# Altium PCB PCB.PcbDoc
Units mm, origin at the board's own origin, x right, y up, seen from the top; angles counter-clockwise.
Board outline 74.5 x 80 mm, 2 copper layers (Top Layer, Bottom Layer), stack 1.571 mm thick; 31 components, 20 nets, 104 pads, 39 vias.
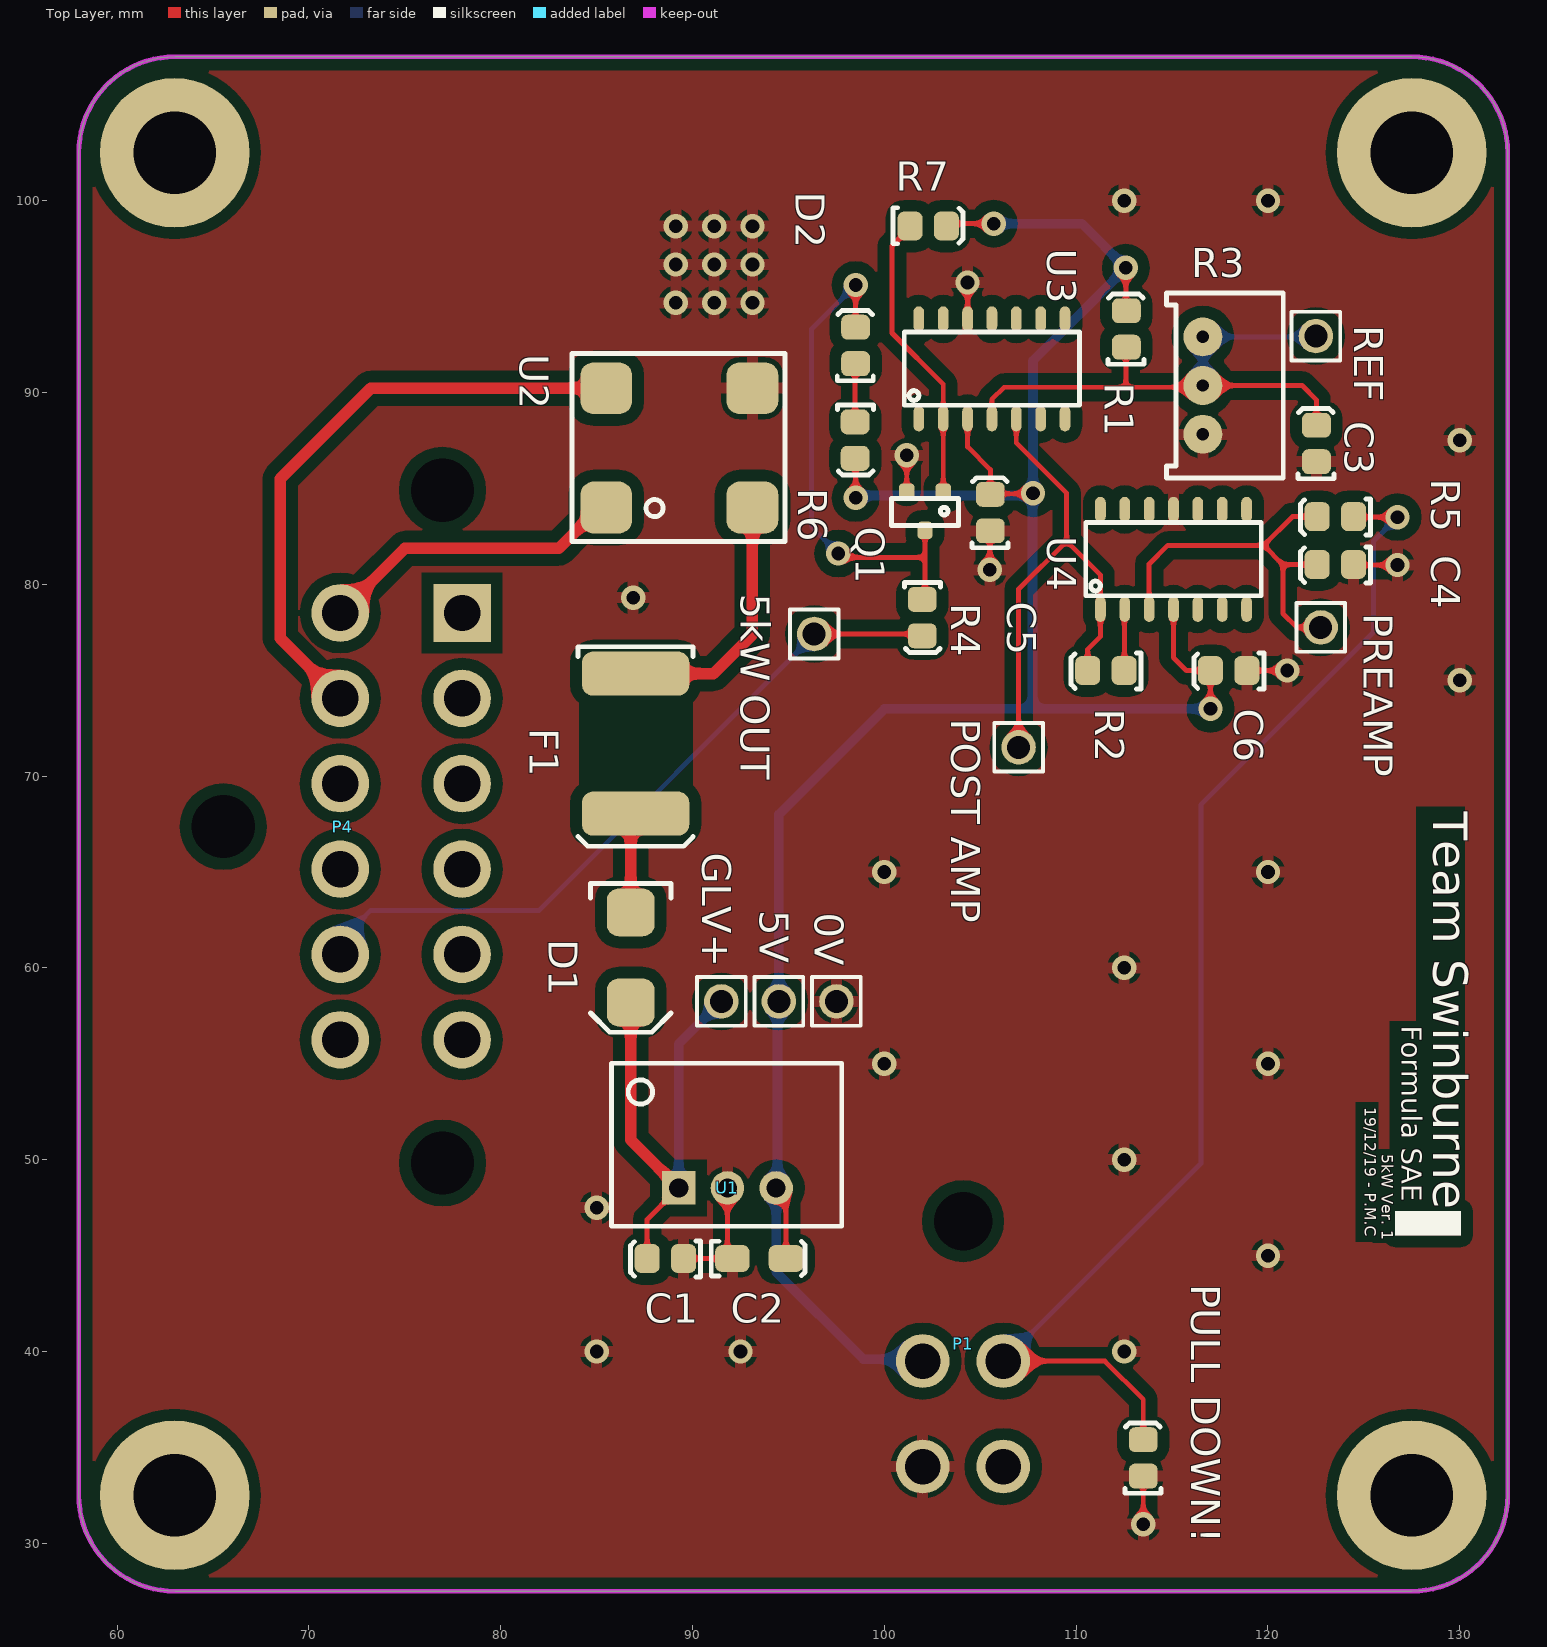
[diagram p0: Top Layer view]
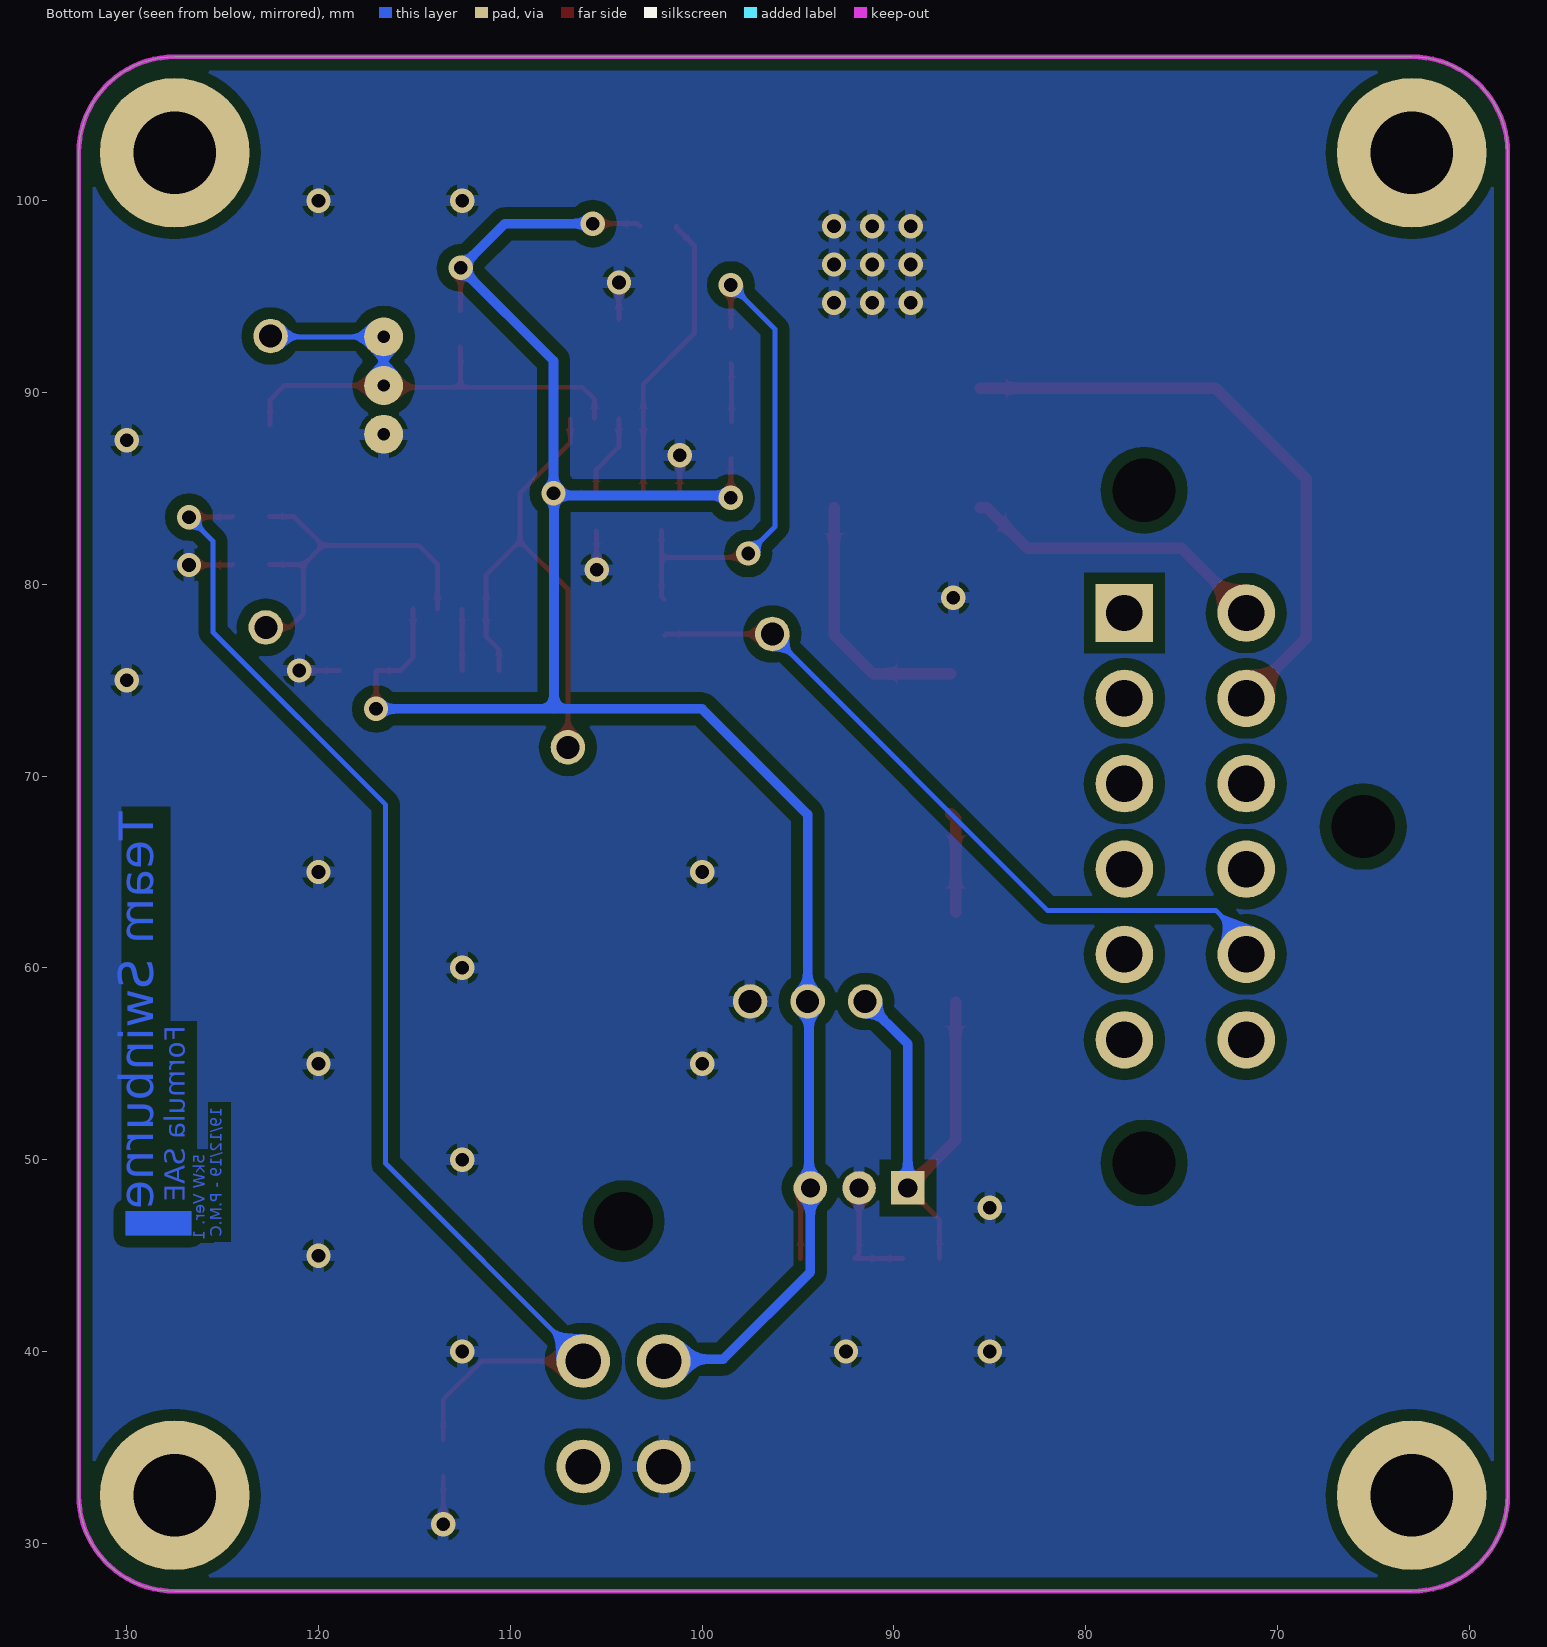
[diagram p1: Bottom Layer view, seen from below]
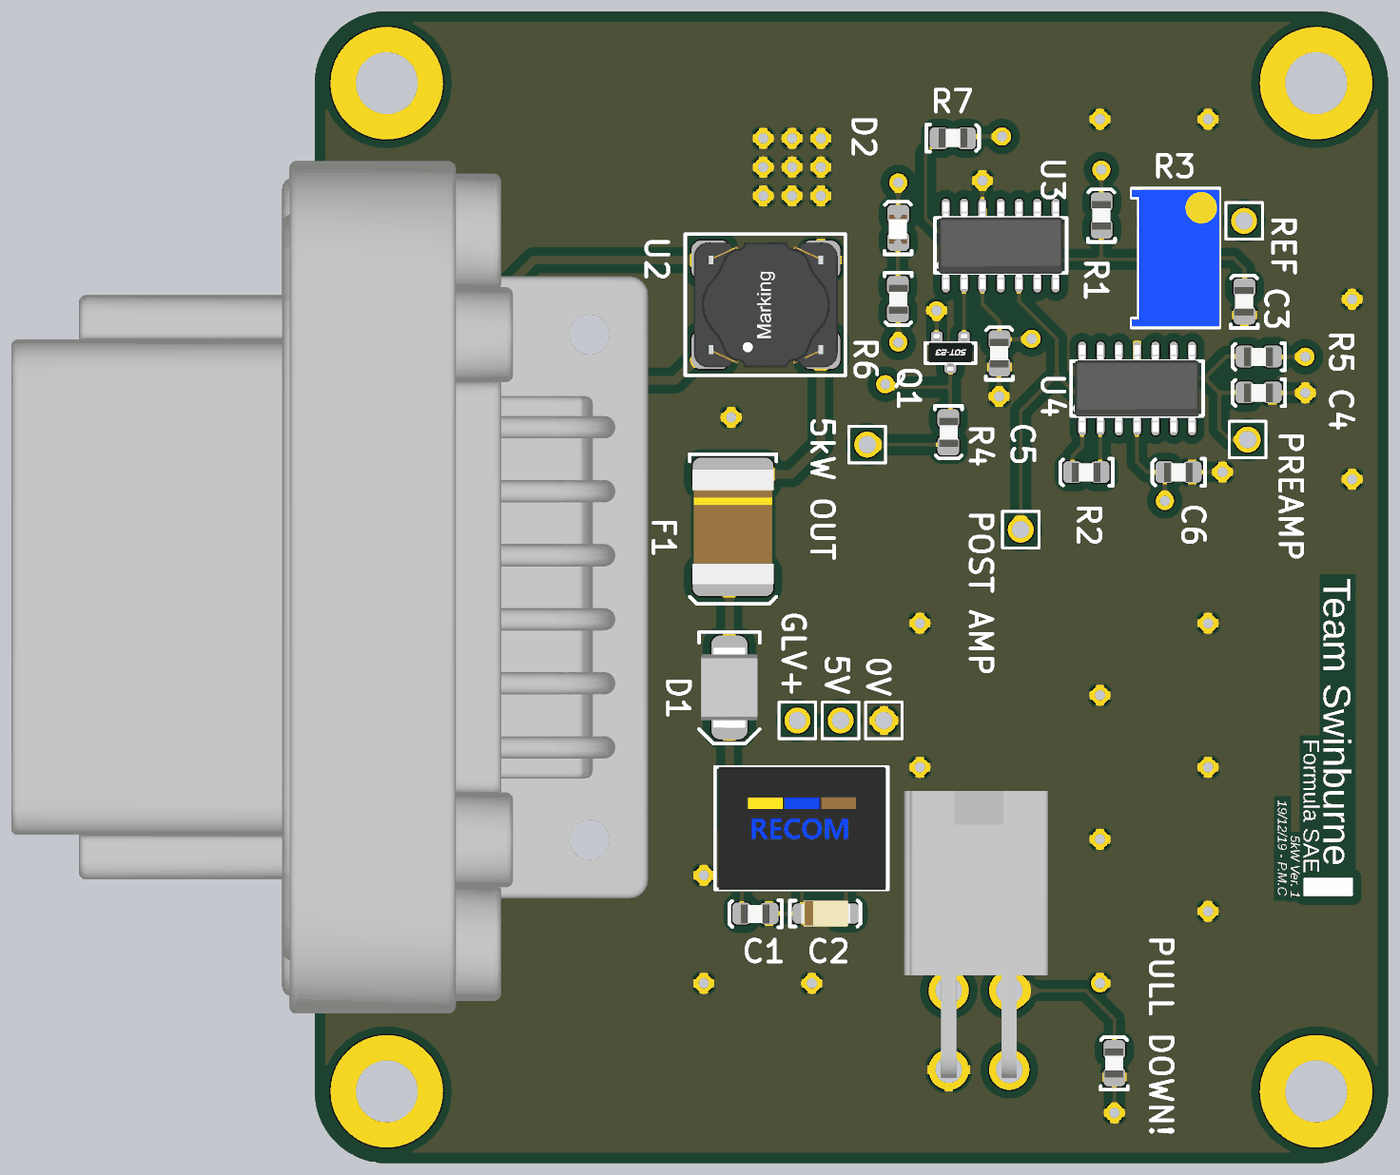
[diagram p2: 3D render of the assembled board from above, using the file's embedded part models]

## Layer stack, top to bottom
Top Solder: solder mask 0.0102, Solder Resist, Dk 3.5
Top Layer: signal copper 0.0356
Dielectric 1: dielectric 1.5, FR-4, Dk 4.8
Bottom Layer: signal copper 0.0356
Bottom Solder: solder mask 0.0102, Solder Resist, Dk 3.5

## Board outline
58,32.5 ccw(c63,32.5) 63,27.5 127.5,27.5 ccw(c127.5,32.5) 132.5,32.5 132.5,102.5 ccw(c127.5,102.5) 127.5,107.5 63,107.5 ccw(c63,102.5) 58,102.5

## Design rules (kind name [scope] priority, off if disabled: settings)
Clearance [All] p1: gap=0.254 ignorepadtopadclearanceinfootprint=FALSE except(0: Arc-Hole Track-Hole SMDPad-Hole THPad-Hole Via-Hole Fill-Hole Poly-Hole Region-Hole Text-Hole; 0.6: Arc-Poly Track-Poly SMDPad-Poly THPad-Poly Via-Poly Fill-Poly Poly-Poly)
Height [All] p1: minheight=0 maxheight=100 prefheight=12.7
PlaneConnect [All] p1: planeconnectstyle=Relief reliefexpansion=0.508 reliefentries=4 reliefconductorwidth=0.6 reliefairgap=0.254
PolygonConnect [All] p1: connectstyle=Relief reliefconductorwidth=0.6 reliefentries=4 polygonreliefangle="90 Angle" airgapwidth=0.254
RoutingVias [All] p1: holewidth=0.711 width=1.27 viastyle="Through Hole" minholewidth=0.711 minwidth=1.27 maxholewidth=0.711 maxwidth=1.27
SolderMaskExpansion [All] p1: expansion=0.102
Width [All] p1: maxlimit=2 minlimit=0.254 preferedwidth=0.254 minimp=50.000000 maximp=50.000000 favimp=50.000000
28 further rules are at their usual default settings.

## Components (designator, comment, footprint, x,y, rotation, side; value= is the part's Value field where it differs from the comment)
0V "0mm" "TH Test Point" 97.5,58.25 r0 top
"5kW OUT" "0mm" "TH Test Point" 96.344,77.406 r90 top
5V "0mm" "TH Test Point" 94.5,58.25 r270 top
C1 "10uF" 0805 88.57,44.819 r180 top
C2 "22uF" 1206 94.672,44.845 r0 top
C3 "100nF" 0805 122.499,87.352 r90 top
C4 "100nF" 0805 123.5,81 r180 top
C5 "100nF" 0805 105.5,83.75 r90 top
C6 "100nF" 0805 117.938,75.474 r180 top
D1 "SD560BTR" "SMB Diode" 86.778,62.645 r270 top
D2 "Blue" "0805 LED" 98.474,92.462 r90 top
F1 "0ZCF0200AF2C" 2920 87.032,75.34 r270 top
GLV+ "0mm" "TH Test Point" 91.5,58.25 r270 top
P1 "26013115" 26013115 106.2,34 r180 top
P4 "DT13-12P" DT13-12P 71.632,78.5 r270 top
"POST AMP" "0mm" "TH Test Point" 107,71.5 r270 top
PREAMP "0mm" "TH Test Point" 122.75,77.75 r0 top
"PULL DOWN!" "30k" 0805 113.474,34.462 r90 top (schematic designator R8)
Q1 "2N7002K" "ON SOT-23 MOSFET" 102.118,83.812 r180 top
R1 "10k" 0805 112.593,93.321 r90 top
R2 "1k" 0805 111.538,75.474 r180 top
R3 "10K (Var)" "B 3296" 117.165,90.273 r270 top
R4 "100R" 0805 102,78.25 r270 top
R5 "1k" 0805 123.5,83.5 r180 top
R6 "1.5k" 0805 98.5,87.5 r270 top
R7 "3k" 0805 102.3,98.7 r0 top
REF "0mm" "TH Test Point" 122.499,92.94 r0 top
U1 "R-78C5.0-1.0" "RECOM 3-SIP" 89.278,48.528 r0 top
U2 "744272121" "Wurth 4-PC Pad" 93.12,90.22 r180 top
U3 "LMV339IDR" "TI 14-SOIC" 120.848,86.029 r0 top
U4 "LM324D" "TI 14-SOIC" 130.314,76.1 r0 top

## Footprints (in the part's own frame and the unit in brackets; to place one, negate y for a bottom-side part, rotate by r counter-clockwise, add the part's x,y. Pads: shape width x height; smd on the part's side, far side on the other; paste and mask are expansions set on the pad)
0805 [mm]
  rrect50% 1.3x1.5 smd: 1(-0.962,-0.026) 2(0.938,-0.026)
  silkscreen extent -1.85,-0.95 1.8,0.93, body extent -1,-0.65 1,0.66, height 0.73
"0805 LED" [mm]
  rrect50% 1.3x1.5 smd: A(-0.962,-0.026) K(0.938,-0.026)
  silkscreen extent -1.85,-0.95 1.8,0.93, body extent -1.1,-0.62 0.9,0.62, height 1
1206 [mm]
  rrect50% 1.8x1.4 smd: 1(-2.6,0) 2(0.2,0)
  silkscreen extent -3.7,-0.9 1.2,0.9, body extent -2.9,-0.9 0.5,0.9, height 1.85
2920 [mm]
  rrect50% 2.3x5.6 smd: 1(0,0) 2(7.3,0)
  silkscreen extent -1.4,-3 9,3, body extent -0.34,-2.81 7.64,2.81, height 1.14
26013115 [mm]
  round 2.8 hole 1.85: 1(4.2,-5.5) 2(0,-5.5) 3(4.2,0) 4(0,0)
  round 1.524 hole 3.05: ""(2.1,-12.8)
  body extent -2.7,-19.37 7.3,0.57, height 11.4
"B 3296" [mil]
  round 80 hole 25.2: 1(-103.39,-22) 2(-3.39,-22) 3(96.61,-22)
  silkscreen extent -193,-97 187,143, body extent -191,-97 184,143, height 455
DT13-12P [mm]
  round 3 hole 3.3 unplated: 0(-6.405,5.33) 0(11.135,-6.1) 0(28.675,5.33)
  rect 3x3 hole 1.9: 1(0,6.35)
  round 3 hole 1.9: 2(4.45,6.35) 3(8.9,6.35) 4(13.35,6.35) 5(17.8,6.35) 6(22.25,6.35) 7(22.25,0) 8(17.8,0) 9(13.35,0) 10(8.9,0) 11(4.45,0) 12(0,0)
  body extent -18.6,-34.7 40.6,9.5, height 37.63
"ON SOT-23 MOSFET" [mm] "NUP2105L"
  rrect50% 0.8x0.9 smd: D(0,1) G(-0.95,-1) S(0.95,-1)
  silkscreen extent -1.75,-0.65 1.75,0.75, body extent -1.5,-1.27 1.5,1.28, height 1
"RECOM 3-SIP" [mm] "12 to 42 Vdc In, 9 Vdc Out"
  rect 1.75x1.75 hole 1: 1(0,0)
  round 1.75 hole 1: 2(2.54,0) 3(5.08,0)
  silkscreen extent -3.5,-2 8.5,6.5, body extent -3.26,-2.02 8.34,6.48, height 11.41
"SMB Diode" [mm]
  rrect50% 2.5x2.5 smd: A(-0.25,0) K(4.45,0)
  silkscreen extent -1.75,-2.1 6,2.1, body extent -0.69,-1.97 4.9,1.97, height 2.5
"TH Test Point" [mm]
  round 1.8 hole 1.2: 1(0,0)
  silkscreen extent -1.27,-1.27 1.27,1.27
"TI 14-SOIC" [mil]
  oval 22x52 smd: 1(-750,102.36) 2(-700,102.36) 3(-650,102.36) 4(-600,102.36) 5(-550,102.36) 6(-500,102.36) 7(-450,102.36) 8(-450,307.09) 9(-500,307.09) 10(-550,307.09) 11(-600,307.09) 12(-650,307.09) 13(-700,307.09) 14(-750,307.09)
  silkscreen extent -780,130 -420,280, body extent -770,86 -430,323, height 69
"Wurth 4-PC Pad" [mm]
  rrect50% 2.7x2.7 smd: 1(7.62,6.22) 2(0,6.22) 3(0,0) 4(7.62,0)
  silkscreen extent -1.7,-1.8 9.4,8, body extent -1.19,-1.24 8.81,7.46, height 6.2

## Part data
0V "5kW OUT" 5V GLV+ "POST AMP" PREAMP REF: library part "TH Test Point", Angle=0, Contact=NA, Flange=No, Part Number="TH Test Point", Pitch=0mm, Positions=1, Row Spacing=0mm
C1: library part GRM21BR6YA106KE43L, Digikey Part Number=490-10514-6-ND, Manufacturer=muRata, Rated Voltage=50V, Tolerance=10%, Material=X5R, Part Number=GRM21BR6YA106KE43L
C2: library part CC1206MKX5R7BB226, Digikey Part Number=311-1997-2-ND, Manufacturer=YAGEO, Rated Voltage=16V, Tolerance=20%, Material=Ceramic, Part Number=CC1206MKX5R7BB226
C3 C4 C5 C6: library part GCM21BR71E104KA37L, Manufacturer=muRata, Rated Voltage=25V, Tolerance=10%, Material=X7R, Part Number=GCM21BR71E104KA37L
D1: "1.2V_F 600V 5A SMB", Digikey Part Number=1655-1530-2-ND, Manufacturer="SMC Diode Solutions", Digikey Link=https://www.digikey.com/product-detail/en/smc-diode-solutions/SD560BTR/1655-1530-2-ND/6022620, Part Number=SD560BTR
D2: library part SML-MN2BCTT86C, "LED BLUE CLEAR 2012 SMD", Digikey Part Number=846-1207-1-ND, Manufacturer="ROHM Semiconductor", Colour=Blue, Digikey Link=https://www.digikey.com/product-detail/en/rohm-semiconductor/SMLMN2BCTT86C/846-1207-1-ND/6057239, Part Number=SML-MN2BCTT86C
F1: "SMD 24V 2A Fuse", Digikey Part Number=507-1749-2-ND, Manufacturer="Bel Fuse Inc", Digikey Link=https://www.digikey.com/product-detail/en/bel-fuse-inc/0ZCF0200AF2C/507-1749-2-ND/4156090, Part Number=0ZCF0200AF2C
P1: Digikey Part Number=WM13112-ND, Angle=90, Contact=Brass, Digikey Link=https://www.digikey.com/products/en?keywords=26013115, Flange=No, Part Number=26013115, Pitch=4.20mm, Positions=4, Row Spacing=4.2mm
P4: library part DT13-12P[[/\]]DT13-12P, Digikey Part Number=1734-1451-ND, Angle=90, Contact=Nickel, Digikey Link=https://www.digikey.com.au/product-detail/en/te-connectivity-deutsch-connectors/DT13-12PA/1734-1451-ND/7220123, Flange=Yes, Part Number=DT13-12P, Pitch=4.44mm, Positions=12, Row Spacing=6.35mm
"PULL DOWN!": library part RC0805FR0730KL, Manufacturer=YAGEO, Rated Voltage=0.125W, Tolerance=0.01, Material=FR-07, Part Number=RC0805FR0730KL
Q1: "60V 380mA, NFET MOSTFET (Small Signal)", Digikey Part Number=2N7002KCT-ND, Manufacturer="ON Semiconductor", Digikey Link=https://www.digikey.com/product-detail/en/on-semiconductor/2N7002K/2N7002KCT-ND/2060375, LatestRevisionDate=29-May-2009, LatestRevisionNote="IPC-7351 Footprint Added.", PackageDescription="4-Pin SOT-343 Package 1.3 mm Pitch, 2.1 mm Lead Span", PackageReference=SOT-343, PackageVersion=Sep-2000, Part Number=2N7002K, Published=24-Mar-1999, Publisher="Altium Limited", Qty=30
R1: library part RC0805FR0710KL, Manufacturer=YAGEO, Rated Voltage=0.125W, Tolerance=0.01, Material=FR-07, Part Number=RC0805FR0710KL
R2 R5: library part RC0805FR071KL, Manufacturer=YAGEO, Rated Voltage=0.125W, Tolerance=0.01, Material=FR-07, Part Number=RC0805FR071KL
R3: library part 3296W-1-103LF, Digikey Part Number=3296W-103LF-ND, Manufacturer="Bournes Inc", Rated Voltage=0.5W, Tolerance=0.1, Part Number=3296W-1-103LF
R4: library part RC0805FR07100RL, Manufacturer=YAGEO, Rated Voltage=0.125W, Tolerance=0.01, Material=FR-07, Part Number=RC0805FR07100RL
R6: library part RC0805FR071K5L, Manufacturer=YAGEO, Rated Voltage=0.125W, Tolerance=0.01, Material=FR-07, Part Number=RC0805FR071K5L
R7: library part RC0805FR073KL, Manufacturer=YAGEO, Rated Voltage=0.125W, Tolerance=0.01, Material=FR-07, Part Number=RC0805FR073KL
U1: "CONV DC/DC 1A 5V OUT SIP VERT", Digikey Part Number=945-1395-5-ND, Manufacturer=Recom, Digikey Link=https://www.digikey.com.au/product-detail/en/recom-power/R-78C5.0-1.0/945-1395-5-ND/2652148, Isolation=Non-Isolated, Part Number=R-78C5.0-1.0
U2: "Common Mode Choke 120UH 2.5A 2LN 460 OHM SMD", Digikey Part Number=732-1489-2-ND, Manufacturer="Wurth Electronics Inc", Digikey Link=https://www.digikey.com/product-detail/en/wurth-electronics-inc/744272121/732-1489-2-ND/1638893, Part Number=744272121
U3: "Comparator General Purpose Open Collector 14-SOIC", Digikey Part Number=296-6611-2-ND, Manufacturer="Texas Instruments", Digikey Link=https://www.digikey.com/product-detail/en/texas-instruments/LMV339MTX-NOPB/296-35446-1-ND/3739150, Part Number=LMV339IDR
U4: "IC OPAMP GP 4 CIRCUIT 14SOIC", Digikey Part Number=296-1390-5-ND, Manufacturer="Texas Instruments", Digikey Link=https://www.digikey.com/product-detail/en/texas-instruments/LM324D/296-1390-5-ND/277039, Part Number=LM324D

## Free pads (board coordinates)
  round 7.8 hole 4.3: 3(63,32.5) 3(63,102.5) 3(127.5,32.5) 3(127.5,102.5)

## Via types
v1: diameter 1.27, hole 0.711, Top Layer to Bottom Layer, 39 vias

## Nets (pads, with @x,y where several pads share a name; then routed paths per layer and width w, separated by ;. In a path a pad name is that pad's centre, name@x,y a point inside that pad or via, vN(x,y) a via of type N, cw(c..) or ccw(c..) an arc to the next point about the centre after c; other vN are vias at no path point)
0V: 0V.1 "PULL DOWN!.1" C1.1 C2.1 C3.1 C4.1 C5.1 C6.1 P1.3 Q1.S R3.3 U1.2 U2.3 U3.12 U4.11 | length 19.1
  Top Layer w0.254: C1.1 C2.1 91.818,45.099 U1.2 ; v1(101.163,86.717) 101.166,86.714 101.166,84.814 Q1.S ; U3.12 v1(104.338,95.734) ; v1(105.5,80.75) 105.5,82.762 C5.1 ; v1(113.5,31) 113.5,33.5 ; C6.1 v1(121,75.5) ; C4.1 124.488,81 v1(126.75,81)
  other v1: 85,40 92.5,40 112.5,40 120,45 85,47.5 112.5,50 100,55 120,55 112.5,60 100,65 120,65 130,75 86.9,79.3 130,87.5 89.127,94.673 91.127,94.673 93.127,94.673 89.127,96.673 91.127,96.673 93.127,96.673 89.127,98.673 91.127,98.673 93.127,98.673 112.5,100 120,100
5kW: "5kW OUT.1" P4.8 R4.2 | length 37.1
  Top Layer w0.254: 96.344,77.406 101.88,77.406 R4.2
  Bottom Layer w0.254: P4.8@71.632,61.407 73.225,63 82,63 96.25,77.25 96.25,77.5
5V: 5V.1 C2.2 C5.2 C6.2 P1.1 R1.2 R6.2 R7.2 U1.3 U3.3 U4.4 | length 124.6
  Top Layer w0.254: U1.3 94.872,48.014 C2.2 ; R6.2 98.5,86.536 v1(98.5,84.5) ; R7.2 103.364,98.8 v1(105.7,98.8) ; U3.3 104.338,87.162 105.526,85.974 C5.2 105.557,84.719 107.719,84.719 v1(107.75,84.75) ; v1(112.593,96.496) 112.593,94.285 R1.2 ; U4.4 115.074,76.176 115.75,75.5 C6.2 v1(117,73.5)
  Bottom Layer w0.5: v1(98.5,84.5) 98.625,84.625 107.625,84.625 v1@107.725,84.725 ; P1.1 101.9,39.6 98.9,39.6 94.358,44.142 U1.3 94.429,48.599 94.429,58.179 5V.1 94.5,68 100,73.5 107.725,73.5 ; v1(105.7,98.8) 110.289,98.8 v1(112.593,96.496) 107.75,91.653 v1(107.75,84.75) v1@107.725,84.725 ; v1(117,73.5) 107.725,73.5 ; 107.725,73.5 v1@107.725,84.725
CANH: P4.3
CANL: P4.2
CANS: P4.1
GLV+: P4.12 U2.1 | length 16.1
  Top Layer w0.6: P4.12 75,81.868 83.025,81.868 85.157,84 U2.1
GLV-: P4.11 U2.4 | length 31.7
  Top Layer w0.6: P4.11 68.5,77.182 68.5,85.5 73.22,90.22 U2.4
"High Sensitivity": "PULL DOWN!.2" P1.2 R5.1 | length 65
  Top Layer w0.254: P1.2 111.5,39.5 113.5,37.5 113.5,35.4 ; R5.1 124.488,83.5 v1(126.75,83.5)
  Bottom Layer w0.254: P1.2 116.5,49.8 116.5,68.5 125.5,77.5 125.5,82.25 v1(126.75,83.5)
"Low Sensitivity": P1.4
NetC1_2: C1.2 D1.K GLV+.1 U1.1 | length 25.7
  Top Layer w0.254: C1.2 87.632,46.882 U1.1
  Top Layer w0.6: D1.K 86.778,51.028 U1.1
  Bottom Layer w0.5: U1.1 89.278,56.028 GLV+.1
NetC3_2: C3.2 R1.1 R3.1 R3.2 REF.1 U3.4 | length 30.4
  Top Layer w0.254: U3.4 105.608,89.638 106.243,90.273 112.593,90.273 ; R1.1 112.593,92.333 112.593,90.273 ; C3.2 122.525,89.612 121.778,90.359 R3.2 116.52,90.273 112.593,90.273
  Bottom Layer w0.254: R3.2 R3.1 122.458,92.899 REF.1
NetC4_2: C4.2 PREAMP.1 R5.2 U4.3 | length 20.2
  Top Layer w0.254: U4.3 113.804,81.054 114.776,82.026 119.776,82.026 ; C4.2 120.776,81.026 ; R5.2 121.276,83.526 119.776,82.026 ; PREAMP.1 121.5,77.75 120.776,78.474 120.776,81.026 ; 119.776,82.026 120.776,81.026
NetD1_A: D1.A F1.2 | length 5.3
  Top Layer w0.6: D1.A 86.778,67.786 F1.2
NetD2_A: D2.A R6.1 | length 3
  Top Layer w0.254: R6.1 98.474,91.474 D2.A
NetD2_K: D2.K Q1.D R4.1 | length 26
  Top Layer w0.254: v1(97.6,81.6) 97.6,81.549 97.749,81.4 102.118,81.4 ; D2.K v1(98.5,95.6) ; R4.1 102.118,79.356 102.118,81.4 ; Q1.D 102.118,81.4
  Bottom Layer w0.254: v1(97.6,81.6) 96.2,83 96.2,93.3 v1(98.5,95.6)
NetF1_1: F1.1 U2.2 | length 13.6
  Top Layer w0.6: F1.1 91.09,75.34 93.12,77.37 U2.2
"NetPOST AMP_1": "POST AMP.1" R2.2 U3.5 U4.1 | length 27
  Top Layer w0.254: U3.5 106.878,87.372 109.5,84.75 109.5,82.25 ; 107,71.5 107,79.75 109.5,82.25 ; R2.2 110.6,76.6 111.264,77.264 U4.1 111.264,80.486 109.5,82.25
NetQ1_G: Q1.G R7.1 U3.2 | length 15.4
  Top Layer w0.254: R7.1 101.338,98.574 100.4,97.636 100.4,93.1 103.068,90.432 U3.2 Q1.G
NetR2_1: R2.1 U4.2 | length 3.2
  Top Layer w0.254: R2.1 112.517,75.517 112.517,78.683 U4.2
pads on no net: P1. P4.0 P4.4 P4.5 P4.6 P4.7 P4.9 P4.10 U3.1 U3.6 U3.7 U3.8 U3.9 U3.10 U3.11 U3.13 U3.14 U4.5 U4.6 U4.7 U4.8 U4.9 U4.10 U4.12 U4.13 U4.14

## Polygon pours and split planes (outlines as drawn)
0V on Bottom Layer "Bottom Layer-0V" (solid, remove dead copper, pour order 6): 56,107.5 132.5,107.5 132.5,27.5 56,27.5
no net on Bottom Layer "Bottom Layer-No Net" (solid, pour order 0): 256.159,107.95
0V on Top Layer "Top Layer-0V" (solid, remove dead copper, pour order 8): 56,107.5 132.5,107.5 132.5,27.5 56,27.5

## Keep-outs
Keep-Out Layer:
  the board outline again, w0.254

## Other copper
Top Layer:
  region: 126.623,47.318 126.623,46.048 130.052,46.048 130.052,47.318
  pour cut-out: 84.1,76.5 84.1,67 90,67 90,76.5
  text "Team Swinburne" at 128.02,68.146 h3.05 r270
  text "Formula SAE" at 126.623,56.97 h1.78 r270
  text "19/12/19 - P.M.C" at 124.845,52.727 h1.02 r270
  text "5kW Ver. 1" at 125.734,50.278 h1.02 r270
Bottom Layer:
  region: 126.623,47.318 126.623,46.048 130.052,46.048 130.052,47.318
  text "Team Swinburne" at 128.02,68.146 h3.05 r270
  text "Formula SAE" at 126.623,56.97 h1.78 r270
  text "19/12/19 - P.M.C" at 124.845,52.727 h1.02 r270
  text "5kW Ver. 1" at 125.734,50.278 h1.02 r270

## Silkscreen, mask and mechanical layers (free items; w line width, h text height)
Top Overlay:
  region: 126.623,47.318 126.623,46.048 130.052,46.048 130.052,47.318
  text "Team Swinburne" at 128.02,68.146 h3.05 r270
  text "Formula SAE" at 126.623,56.97 h1.78 r270
  text "19/12/19 - P.M.C" at 124.845,52.727 h1.02 r270
  text "5kW Ver. 1" at 125.734,50.278 h1.02 r270

## Dimensions
63,107.5 to 63,27.5 on Drill Drawing
58,102.5 to 132.5,102.5 on Drill Drawing